# Altium PCB Counter_Display_v2.PcbDoc
Units mm, origin at the board's own origin, x right, y up, seen from the top; angles counter-clockwise.
Board outline 70 x 40 mm, 4 copper layers (Top Layer, Top, Vcc, GND, Bottom Layer, Bottom), stack 1.783 mm thick; 79 components, 66 nets, 245 pads, 272 vias.
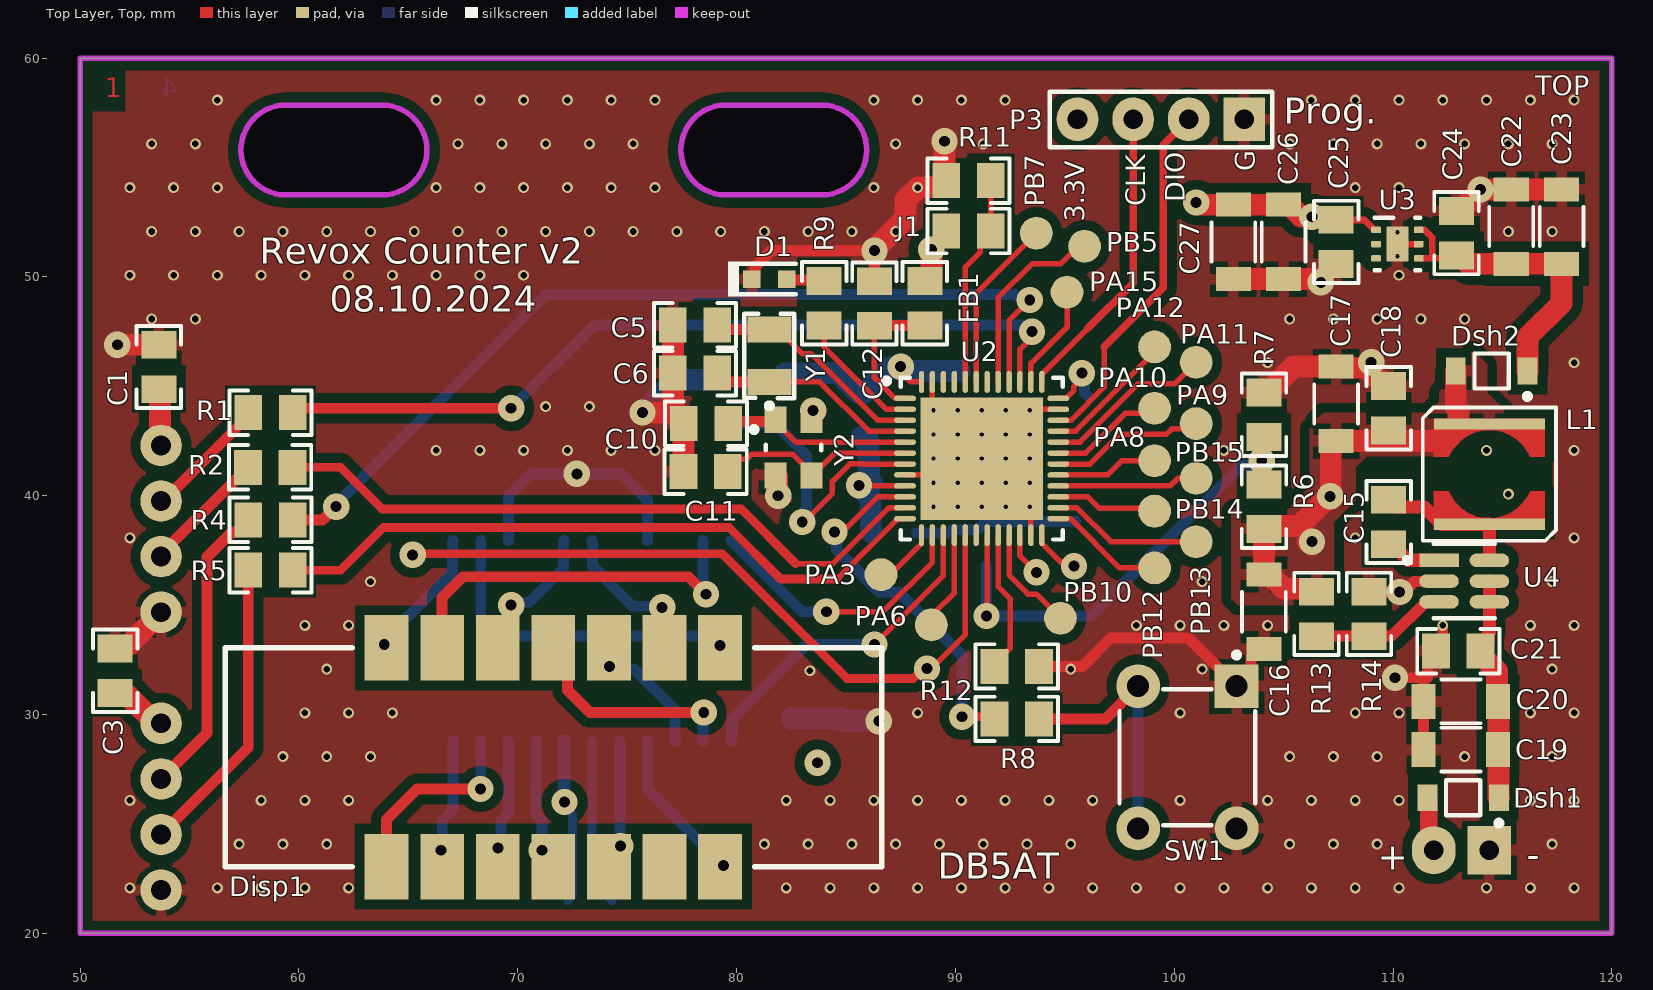
[diagram p0: Top Layer, Top view]
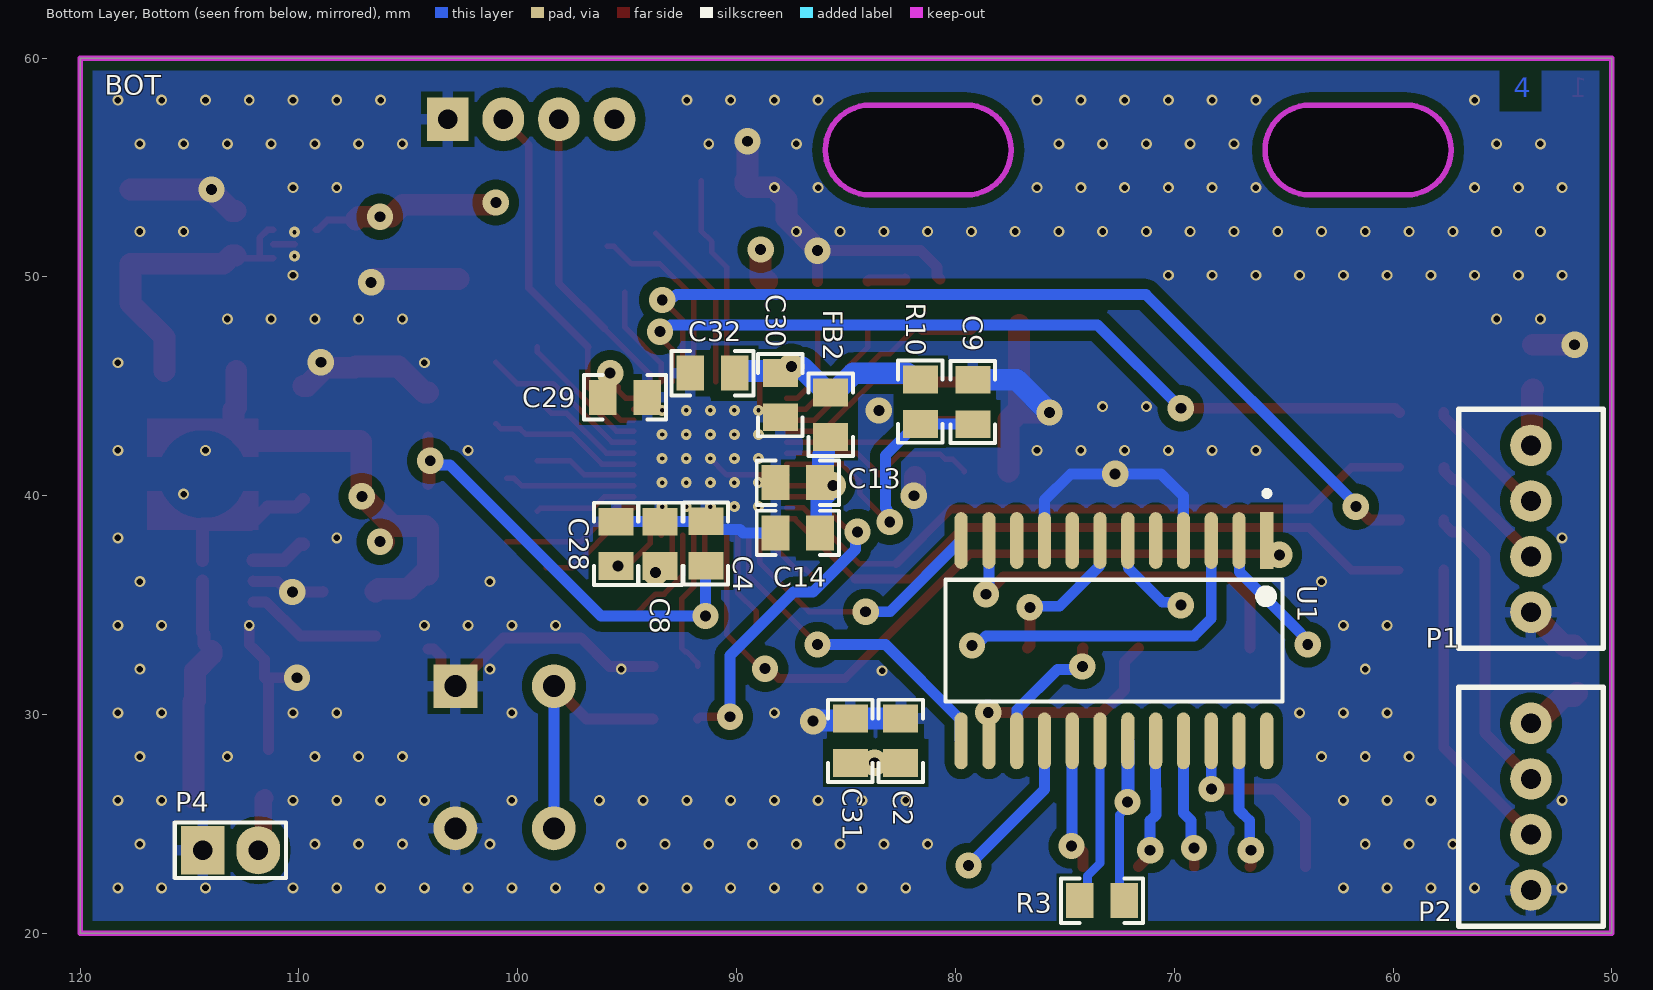
[diagram p1: Bottom Layer, Bottom view, seen from below]
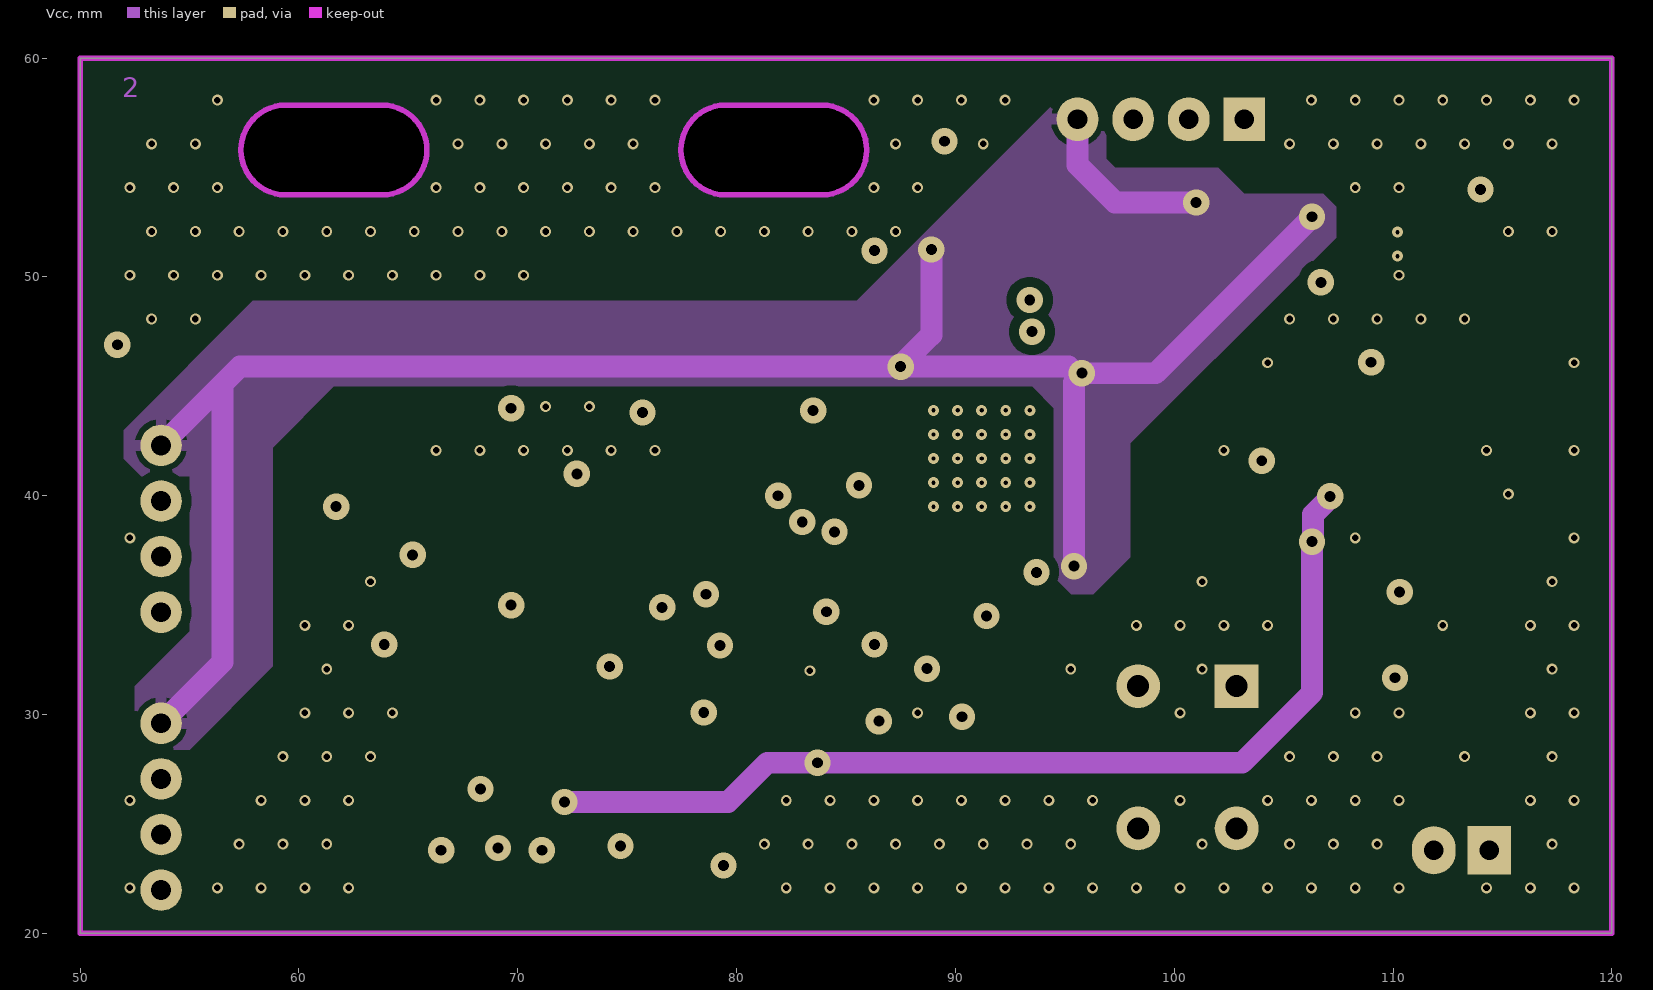
[diagram p2: Vcc]
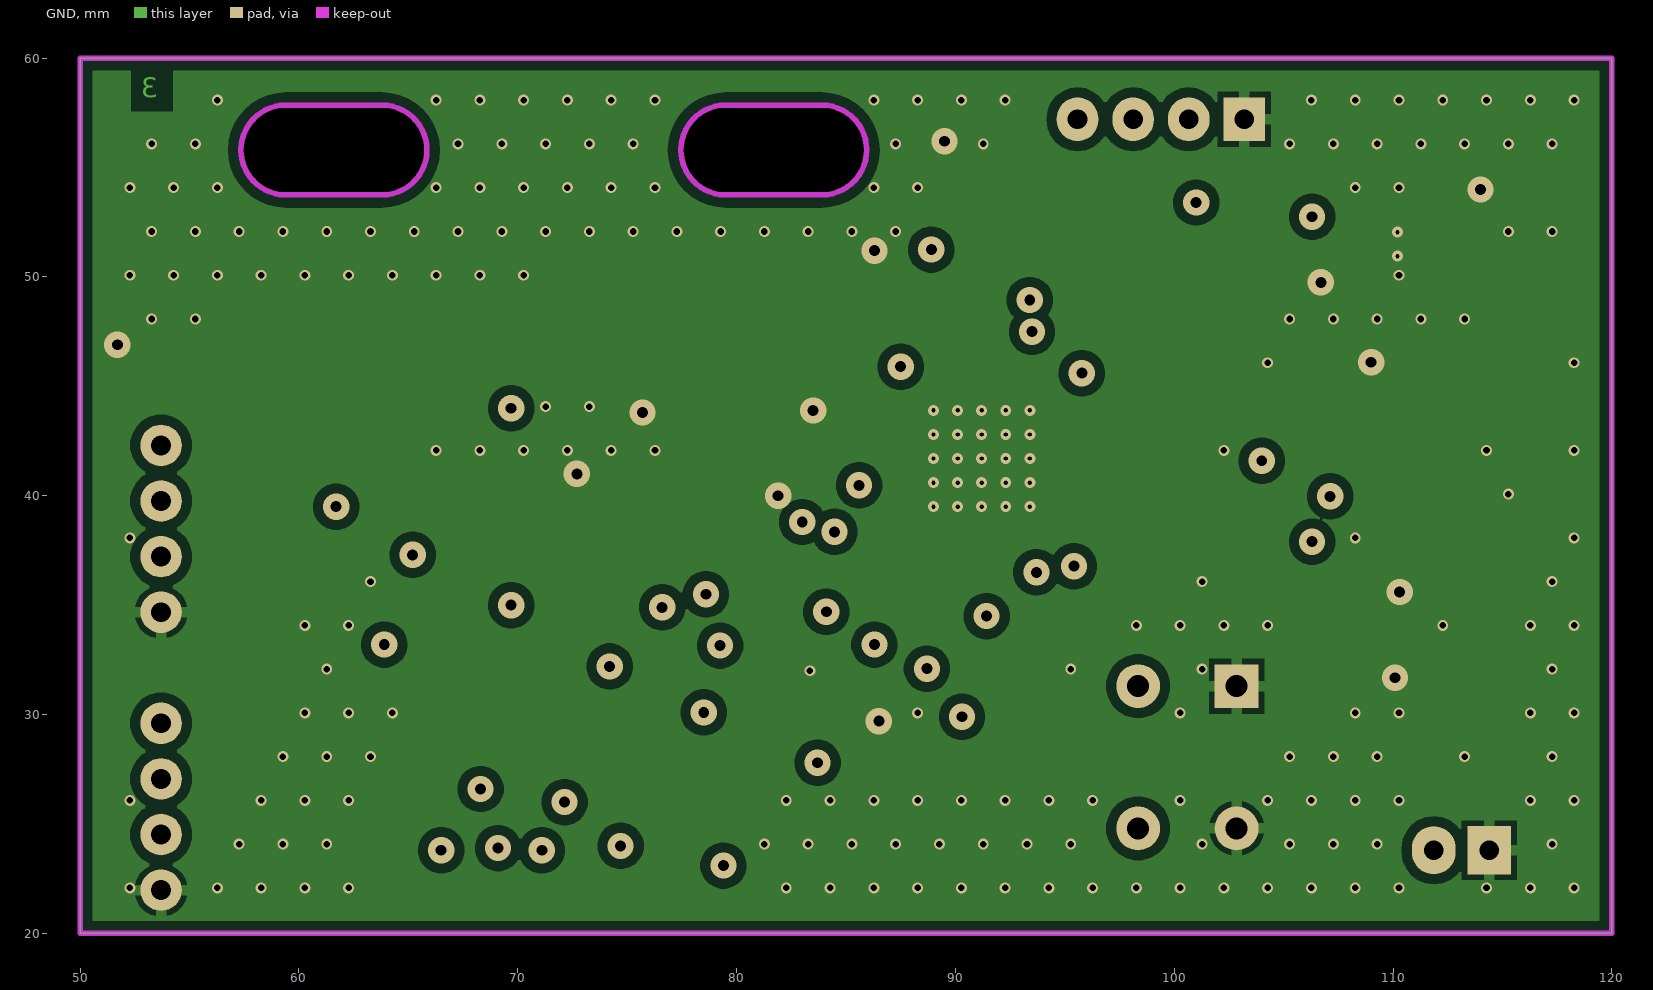
[diagram p3: GND]

## Layer stack, top to bottom
Top Solder, Top Mask: solder mask 0.0102, Solder Resist, Dk 3.5
Top Layer, Top: signal copper 0.0356
Dielectric 2: prepreg 0.0711, PP-006, Dk 4.1
Vcc: signal copper 0.035
Dielectric 1: dielectric 1.5, FR-4, Dk 4.8
GND: signal copper 0.035
Dielectric 3: prepreg 0.0711, PP-006, Dk 4.1
Bottom Layer, Bottom: signal copper 0.0356
Bottom Solder, Bot Mask: solder mask 0.0102, Solder Resist, Dk 3.5

## Board outline
50,20 50,60 120,60 120,20
cut-out: 79.5,53.75 83.9,53.75 ccw(c83.9,55.8) 83.9,57.85 79.5,57.85 ccw(c79.5,55.8)
cut-out: 59.4,53.75 cw(c59.4,55.8) 59.4,57.85 63.8,57.85 cw(c63.8,55.8) 63.8,53.75

## Design rules (kind name [scope] priority, off if disabled: settings)
BoardOutlineClearance [All] p1 off: gap=0.2 ignorepadtopadclearanceinfootprint=FALSE except(0.4: Arc-SplitBarrior Arc-SplitContinuation Track-SplitBarrior Track-SplitContinuation SMDPad-SplitBarrior SMDPad-SplitContinuation THPad-SplitBarrior THPad-SplitContinuation Via-SplitBarrior Via-SplitContinuation Fill-SplitBarrior Fill-SplitContinuation Poly-SplitBarrior Poly-SplitContinuation Region-SplitBarrior Region-SplitContinuation Text-SplitBarrior Text-SplitContinuation)
Clearance [All] p1: gap=0.2 ignorepadtopadclearanceinfootprint=FALSE
ComponentClearance [All] p1: gap=0.254 collisioncheckmode=3 verticalgap=0 showdistances=FALSE donotcheckwithout3dbody=TRUE
Height [All] p1: minheight=0 maxheight=125.4 prefheight=12.7
HoleSize [All] p1: absolutevalues=TRUE maxlimit=6.3 minlimit=0.2 maxpercent=80.000 minpercent=20.000
MinimumAnnularRing [All] p1: minimumring=0.076
MinimumSolderMaskSliver [All] p1: minsoldermaskwidth=0.01
PolygonConnect PolygonConnect_1 [All] p1: thpad.connectstyle=Relief thpad.reliefconductorwidth=0.508 thpad.reliefentries=4 thpad.polygonreliefangle="90 Angle" thpad.airgapwidth=0.254 smdpad.connectstyle=Relief smdpad.reliefconductorwidth=0.508 smdpad.reliefentries=4 smdpad.polygonreliefangle="90 Angle" smdpad.airgapwidth=0.254 via.connectstyle=Direct via.reliefconductorwidth=0.508 via.reliefentries=4 via.polygonreliefangle="90 Angle" via.airgapwidth=0.254
RoomDefinition Counter_Display_v2 [InComponentClass('Counter_Display_v2')] p1: confinementstyle=ConfineIn formatcopy=TRUE lockcomponents=FALSE outline -57.729,-79.923 -6.929,-79.923 -6.929,-54.523 -57.729,-54.523
RoutingCorners [All] p1: cornerstyle=Round minsetback=2.54 maxsetback=2.54
RoutingVias [All] p1: holewidth=0.5 width=1 viastyle="Through Hole" minholewidth=0.2 minwidth=0.45 maxholewidth=3.5 maxwidth=6.5
SilkToSilkClearance [All] p1 off: silktosilkclearance=0.01
SilkToSolderMaskClearance [IsPad] p1 off: minsilkscreentomaskgap=0.01 clearancetoexposedcopper=TRUE
SolderMaskExpansion [All] p1: expansion=0.102 istentingtop=FALSE
Width [All] p1: maxlimit=2.54 minlimit=0.089 preferedwidth=0.381
23 further rules are at their usual default settings.

## Components (designator, comment, footprint, x,y, rotation, side; value= is the part's Value field where it differs from the comment)
C1 "" 0805_HV 53.6,45.884 r90 top value=100n
C2 "" 0805_HV 82.5,28.8 r270 bottom value=100n
C3 "" 0805_HV 51.6,32 r90 top value=100n
C4 "" 0805_HV 91.4,37.816 r90 bottom value=1u
C5 "" 0805_HV 78.1,47.8 r0 top value=1.5p
C6 "" 0805_HV 78.1,45.6 r0 top value=1.5p
C8 "" 0805_HV 93.5,37.8 r90 bottom value=2,2u
C9 "" 0805_HV 79.2,44.284 r270 bottom value=100n
C10 "" 0805_HV 78.6,43.3 r0 top value=8p
C11 "" 0805_HV 78.584,41.1 r180 top value=8p
C12 "" 0805_HV 86.3,48.784 r270 top value=100n
C13 "" 0805_HV 87.2,40.6 r0 bottom value=1u
C14 "" 0805_HV 87.2,38.3 r0 bottom value=100n
C15 "" 0805_HV 109.8,38.8 r90 top value=100n
C16 "" 1206_180 104.1,34.7 r270 top value=10uF
C17 "" 1206_180 107.4,44.2 r90 top value=10uF
C18 "" 0805_HV 109.8,44 r90 top value=100n
C19 "" 1206_180 113.1,28.4 r180 top value=10uF
C20 "" 1206_180 113.1,30.6 r180 top value=10uF
C21 "" 0805_HV 112.984,32.9 r180 top value=100n
C22 "" 1206_180 115.4,52.3 r90 top value=10uF
C23 "" 1206_180 117.7,52.3 r90 top value=10uF
C24 "" 0805_HV 112.9,52 r90 top value=100n
C25 "" 0805_HV 107.4,51.6 r270 top value=100n
C26 "" 1206_180 105,51.6 r270 top value=10uF
C27 "" 1206_180 102.7,51.6 r270 top value=10uF
C28 "" 0805_HV 95.5,37.8 r90 bottom value=100n
C29 "" 0805_HV 95.1,44.5 r180 bottom value=100n
C30 "" 0805_HV 88,44.6 r270 bottom value=100n
C31 "" 0805_HV 84.8,28.8 r270 bottom value=1u
C32 "" 0805_HV 91.1,45.6 r0 bottom value=100n
D1 "150060GS75000" WL-SMCW_GREEN 81.5,49.9 r0 top value=Green
Disp1 "5 Digit 7 Segment" "5 Digit 7 Seg LED" 71.625,28.05 r0 top locked
Dsh1 "DIODE_Shottky" ONSC-SOD-123-2-425-04_V 113.2,26.2 r180 top value=STPST2H100ZFY
Dsh2 "DIODE_Shottky" ONSC-SOD-123-2-425-04_V 114.5,45.7 r180 top value=STPST2H100ZFY
FB1 "" 0805_HV 88.6,48.8 r90 top
FB2 "" 0805_HV 85.7,43.7 r90 bottom
J1 "" 0805_HV 90.6,52.1 r180 top
L1 "MSS5121-333MLB" MSS5121 114.4,40.986 r90 top value=33uH
P1 "Header 4" "4-Pol. Connector" 53.7,34.68 r90 bottom locked
P2 "Header 4" "4-Pol. Connector" 53.7,21.98 r90 bottom locked
P3 "Header 4" HDR1X4 103.2,57.2 r180 top
P4 "Header 2" HDR1X2 114.4,23.8 r180 bottom
PA3 "" TP#1 86.6,36.4 r0 top
PA6 "" TP#1 88.9,34.1 r90 top
PA8 "" TP#2 97.9,41.6 r90 top
PA9 "" TP#3 100.3,43.3 r90 top
PA10 "" TP#4 98,44 r90 top
PA11 "" TP#5 101.6,46.1 r90 top
PA12 "" TP#4 98,46.8 r90 top
PA15 "" TP#1 95.1,49.3 r90 top
PB5 "" TP#1 95.9,51.4 r90 top
PB7 "" TP#1 93.7,52 r90 top
PB10 "" TP#1 94.8,34.4 r90 top
PB12 "" TP#6 97.2,36.7 r90 top
PB13 "" TP#7 99.2,37.9 r90 top
PB14 "" TP#8 97.4,39.3 r90 top
PB15 "" TP#8 99.3,40.8 r90 top
R1 "" 0805_HV 58.7,43.8 r0 top value=120
R2 "" 0805_HV 58.684,41.3 r0 top value=120
R3 "" 0805_HV 73.3,21.5 r0 bottom value=51k
R4 "" 0805_HV 58.7,38.9 r0 top value=120
R5 "" 0805_HV 58.7,36.6 r0 top value=120
R6 "" 0805_HV 104.1,39.5 r90 top value=100k
R7 "" 0805_HV 104.1,43.7 r90 top value=33k
R8 "" 0805_HV 92.8,29.8 r180 top value=120
R9 "" 0805_HV 84,48.8 r270 top value=220
R10 "" 0805_HV 81.6,44.3 r90 bottom value=4,7k
R11 "" 0805_HV 90.6,54.4 r0 top value=10k
R12 "" 0805_HV 92.8,32.2 r180 top value=10k
R13 "" 0805_HV 106.5,34.6 r270 top value=68k
R14 "" 0805_HV 108.9,34.6 r90 top value=22k
SW1 "B3F-1052" Omron_B3F-1052_0 100.6,28.05 r90 top locked
U1 "MAX7219CWG+" Maxim_Integrated_W24-1_IPC_A 72.755,33.378 r270 bottom
U2 "STM32F401CCU6" STM-UFQFPN48_M 91.2,41.7 r0 top
U3 "LP5912Q3.3DRVRQ1" DRV0006A 110.2,51.5 r0 top
U4 "LMR50410Y5FQDBVRQ1" Texas_Instruments_DBV0006A_IPC_A 113.25,36.1 r0 top
Y1 "Qartz_32,768kHz" Quartz_32.768kHz 81.5,46.4 r90 top
Y2 "Qartz_20MHz" "Crystal Oscilator 25MHz" 82.6,42.2 r0 top

## Footprints (in the part's own frame and the unit in brackets; to place one, negate y for a bottom-side part, rotate by r counter-clockwise, add the part's x,y. Pads: shape width x height; smd on the part's side, far side on the other; paste and mask are expansions set on the pad)
"4-Pol. Connector" [mm]
  round 1.9 hole 0.9: 1(0,0) 2(2.54,0) 3(5.08,0) 4(7.62,0)
  silkscreen extent -1.65,-3.3 9.27,3.3
"5 Digit 7 Seg LED" [mm]
  rect 2x3 smd: 1(-7.62,-5) 2(-5.08,-5) 3(-2.54,-5) 4(0,-5) 5(2.54,-5) 6(5.08,-5) 7(7.62,-5) 8(7.62,5) 9(5.08,5) 10(2.54,5) 11(0,5) 12(-2.54,5) 13(-5.08,5) 14(-7.62,5)
  silkscreen extent -15,-5 15,5
0805_HV [mil]
  rect 50x63 smd: 1(-40,0) 2(40,0)
  silkscreen extent -74,-40 74,40, body extent -43,-29 43,29, height 57
1206_180 [mm]
  rect 1.1x1.6 smd: 1(-1.7,0) 2(1.7,0)
  silkscreen extent -0.9,-1 0.9,1, body extent -1.75,-0.95 1.75,0.95, height 1.9
"Crystal Oscilator 25MHz" [mm]
  rect 1x1.2 smd paste+0 mask+0: 1(-0.825,1.27) 2(-0.825,-1.27) 3(0.825,-1.27) 4(0.825,1.27)
  silkscreen extent -1.92,-0.13 1.27,0.95, body extent -1.3,-1.38 1.3,1.38, height 0.25
DRV0006A [mm]
  rrect33% 0.45x0.3 smd: 1(-0.975,0.65) 2(-0.975,0) 3(-0.975,-0.65) 4(0.975,-0.65) 5(0.975,0) 6(0.975,0.65)
  rrect50% 1x0.7 on Top Paste: 7(0,-0.45) 7(0,0.45)
  rrect10% 1x1.6 smd paste-0.5: 7(0,0)
  silkscreen extent -1.05,-1.2 1.05,1.2, body extent -1.05,-1.05 1.05,1.05, height 0.81
HDR1X2 [mm] "Connector; Header; 2 Position"
  rect 2x2.2 hole 0.9: 1(0,0)
  oval 2x2.2 hole 0.9: 2(2.54,0)
  silkscreen extent -1.27,-1.27 3.81,1.27
HDR1X4 [mm] "Connector; Header; 4 Position"
  rect 1.9x2 hole 0.9: 1(0,0)
  oval 1.9x2 hole 0.9: 2(2.54,0) 3(5.08,0) 4(7.62,0)
  silkscreen extent -1.27,-1.27 8.89,1.27
Maxim_Integrated_W24-1_IPC_A [mm]
  rect 2.598x0.607 smd paste+0 mask+0: 1(-4.578,6.985)
  rrect100% 2.598x0.607 smd paste+0 mask+0: 2(-4.578,5.715) 3(-4.578,4.445) 4(-4.578,3.175) 5(-4.578,1.905) 6(-4.578,0.635) 7(-4.578,-0.635) 8(-4.578,-1.905) 9(-4.578,-3.175) 10(-4.578,-4.445) 11(-4.578,-5.715) 12(-4.578,-6.985) 13(4.578,-6.985) 14(4.578,-5.715) 15(4.578,-4.445) 16(4.578,-3.175) 17(4.578,-1.905) 18(4.578,-0.635) 19(4.578,0.635) 20(4.578,1.905) 21(4.578,3.175) 22(4.578,4.445) 23(4.578,5.715) 24(4.578,6.985)
  silkscreen extent -6.85,-7.7 2.78,7.7, body extent -5.16,-7.7 5.16,7.7, height 2.61
MSS5121 [mil]
  rect 20x200 smd: 1(-90,0) 2(90,0)
  Top Layer, Top region: 31,-100 31,-73.21 31,-73.21 37.97,-69.85 50.77,-61.17 61.66,-50.19 70.21,-37.3 76.1,-23 79.11,-7.83 79.13,7.63 76.16,22.81 70.3,37.12 61.79,50.03 50.93,61.04 38.15,69.75 31.19,73.13 31.19,73.13 31,73.4 31,100 100,100 100,-100
  Top Layer, Top region: -31,-100 -31,-73.21 -31,-73.21 -37.97,-69.85 -50.77,-61.17 -61.66,-50.19 -70.21,-37.3 -76.1,-23 -79.11,-7.83 -79.13,7.63 -76.16,22.81 -70.3,37.12 -61.79,50.03 -50.93,61.04 -38.15,69.75 -31.19,73.13 -31.19,73.13 -31,73.4 -31,100 -100,100 -100,-100
  silkscreen extent -120,-120 120,120, body extent -106,-106 106,106, height 87
Omron_B3F-1052_0 [mm]
  rect 2x2 hole 1 paste-1000 mask+0: 1(3.25,-2.25)
  round 2 hole 1 paste-1000 mask+0: 2(-3.25,-2.25) 3(3.25,2.25) 4(-3.25,2.25)
  silkscreen extent -3.1,-3.1 4.8,3.1, body extent -4.13,-3.2 4.13,3.2, height 0.25
ONSC-SOD-123-2-425-04_V [mm] "SOD, 2-Leads, Body 2.69x1.6mm"
  rect 0.91x1.22 smd: A(1.635,0) K(-1.635,0)
  silkscreen extent -1.76,-0.8 0.78,1.28, body extent -1.35,-0.8 1.35,0.8, height 1.35
Quartz_32.768kHz [mm]
  rect 1.2x2 smd paste+0 mask+0: 1(-1.2,0) 2(1.2,0)
  silkscreen extent -2.41,-1.14 1.91,1.14
STM-UFQFPN48_M [mm] "QFN, 48-Leads, Body 7.1x7.1mm, Pitch 0.5mm, Thermal Pad 5.6x5.6mm, IPC Low Density"
  oval 1x0.25 smd: 1(-3.5,2.75) 2(-3.5,2.25) 3(-3.5,1.75) 4(-3.5,1.25) 5(-3.5,0.75) 6(-3.5,0.25) 7(-3.5,-0.25) 8(-3.5,-0.75) 9(-3.5,-1.25) 10(-3.5,-1.75) 11(-3.5,-2.25) 12(-3.5,-2.75) 25(3.5,-2.75) 26(3.5,-2.25) 27(3.5,-1.75) 28(3.5,-1.25) 29(3.5,-0.75) 30(3.5,-0.25) 31(3.5,0.25) 32(3.5,0.75) 33(3.5,1.25) 34(3.5,1.75) 35(3.5,2.25) 36(3.5,2.75)
  oval 0.25x1 smd: 13(-2.75,-3.5) 14(-2.25,-3.5) 15(-1.75,-3.5) 16(-1.25,-3.5) 17(-0.75,-3.5) 18(-0.25,-3.5) 19(0.25,-3.5) 20(0.75,-3.5) 21(1.25,-3.5) 22(1.75,-3.5) 23(2.25,-3.5) 24(2.75,-3.5) 37(2.75,3.5) 38(2.25,3.5) 39(1.75,3.5) 40(1.25,3.5) 41(0.75,3.5) 42(0.25,3.5) 43(-0.25,3.5) 44(-0.75,3.5) 45(-1.25,3.5) 46(-1.75,3.5) 47(-2.25,3.5) 48(-2.75,3.5)
  rect 5.6x5.6 smd: 49(0,0)
  silkscreen extent -4.47,-3.7 3.7,3.7, body extent -3.55,-3.55 3.55,3.55, height 0.6
Texas_Instruments_DBV0006A_IPC_A [mm]
  rect 1.805x0.61 smd paste+0 mask+0: 1(-1.15,0.95)
  rrect100% 1.805x0.61 smd paste+0 mask+0: 2(-1.15,0) 3(-1.15,-0.95) 4(1.15,-0.95) 5(1.15,0) 6(1.15,0.95)
  silkscreen extent -2.73,-1.7 1.4,1.7, body extent -2.55,-1.95 2.55,1.95, height 0.25
TP#1 [mm]
  round 1.5 smd: 1(0,0)
TP#2 [mm]
  round 1.5 smd: 1(0,-1.2)
TP#3 [mm]
  round 1.5 smd: 1(0,-0.7)
TP#4 [mm]
  round 1.5 smd: 1(0,-1.1)
TP#5 [mm]
  round 1.5 smd: 1(0,0.6)
TP#6 [mm]
  round 1.5 smd: 1(0,-1.9)
TP#7 [mm]
  round 1.5 smd: 1(0,-1.8)
TP#8 [mm]
  round 1.5 smd: 1(0,-1.7)
WL-SMCW_GREEN [mm]
  rect 0.8x0.8 smd: 1(-0.8,0) 2(0.8,0)
  silkscreen extent -1.9,-0.8 1.2,0.8, body extent -0.85,-0.45 0.85,0.45, height 0.8

## Part data
C1 C2 C3 C4 C5 C6 C8 C9 C10 C11 C12 C13 C14 C15 C18 C21 C24 C25 C28 C29 C30 C31 C32: library part C0805, "CAP, CERM, +/- 10%, X7S,  0805", TempCo=X7S, Tolerance_%=10, Value1=25V, CompType=Capacitor, MountType=SMT, PackageReference=0805, SizeArea_mm2=2.5, SizeAreaWB_mm2=6.75, SizeX_mm=2, SizeY_mm=1.25, SizeZ_mm=1.45, Technology=Ceramic
C16 C17 C19 C20 C22 C23 C26 C27: library part C1206, "CAP, CERM, NP0, 1206", TempCo=X7R, Tolerance_%=10, Value1=50V, MountType=SMT, PackageReference=1206, SizeArea_mm2=5.12, SizeAreaWB_mm2=10.92, SizeX_mm=3.2, SizeY_mm=1.6, SizeZ_mm=1.8, TaMax_C=125, TaMin_C=-55, Technology=Ceramic
D1: "LED, Green, SMD", Color=Green, Manufacturer="Wurth Elektronik", Supplier Part Number 1=732-4971-1-ND, Value1=W, Value2=3.2V, Angle=140, ComponentLink1Description="Datasheet link", ComponentLink1URL=http://katalog.we-online.de/led/datasheet/150060GS75000.pdf, CompType=LED, Io_A=0.02, LatestRevisionDate=2015-10-23, MountType=SMT, PackageReference=LED_0603, PartNumber=150060GS75000, Published=2008-07-11, Publisher="Texas Instruments", RoHS=Y, Supplier 1=Digi-Key, Supplier 2=Mouser, Supplier 3=Farnell, Supplier Part Number 2=710-150060GS75000, Supplier Part Number 3=2322070, SymbolVersion=2008-11-06, Tjmax_C=85, Type=InGaN, U/M=EA, Vf_V=3.2
Disp1: "0,2\" 7 Segment LED 5 Digit Display"
Dsh1 Dsh2: "Diode Shottky"
FB1 FB2 J1 R1 R2 R3 R4 R5 R6 R7 R8 R9 R10 R11 R12 R13 R14: library part R0805, "RES, 1%, 0.1 W, 0805", Value1=1%, MountType=SMT, PackageReference=0805, SizeX_mm=2, SizeY_mm=1.25, SizeZ_mm=0.75
L1: "Inductor, Shielded Drum Core, Ferrite, 33 µH, 0.67 A, 0.48 ohm, SMD", Manufacturer=Coilcraft, Value1="0.48 ohm", Value2=0.67A, ValueDisplayed=4,7µH, AEC Category=Q200, AEC Qualified=?, ComponentLink1Description="Datasheet link", ComponentLink1URL=http://www.coilcraft.com/pdfs/mss5121.pdf, CompType=Inductor, DCR_ohm=0.48, Imax_A=0.67, Ind_H=33.0E-6, Irms="0.76A @ 40C rise", Isat="0.67A @ 30% inductance drop", LatestRevisionDate=2016-06-24, Material=Ferrite, MountType=SMT, PackageReference=MSS5121, PartNumber=MSS5121-333MLB, Published=2008-06-26, Publisher="Texas Instruments", RoHS=Y, SymbolVersion=2008-07-23, Technology="Shielded Drum Core"
P1 P2 P3: "Header, 4-Pin", LatestRevisionDate=17-Jul-2002, LatestRevisionNote="Re-released for DXP Platform.", Publisher="Altium Limited"
P4: "Header, 2-Pin", LatestRevisionDate=17-Jul-2002, LatestRevisionNote="Re-released for DXP Platform.", Publisher="Altium Limited"
PA3 PA6 PA8 PA9 PA10 PA11 PA12 PA15 PB5 PB7 PB10 PB12 PB13 PB14 PB15: library part TP, "Test Point, Miniature, Red, TH", Color=Red, Manufacturer=Keystone, PartNumber=5000, Supplier Part Number 1=36-5000-ND, CNHeader=FALSE, ComponentLink1Description="Datasheet URL", ComponentLink1URL=http://www.keyelco.com/userAssets/file/M60-2p60.pdf, CompType="Test Point", ContactFinish=Silver, CT=TRUE, Green_EU RoHS=Passed, Green_EU RoHS-2=Incomplete, Green_Lifecycle=Active, Green_REACh=Passed, LatestRevisionDate=26/05/2017, MountType=TH, PackageReference="Red Miniature Testpoint", Publisher="Texas Instruments", RoHS=Y, Supplier 1=Digi-Key, Supplier 2=Mouser, Supplier Part Number 2=534-5000
U2: "ARM Cortex-M4 32-bit MCU+FPU, 105 DMIPS, 256 kB Flash, 64 kB Internal RAM, 36 I/Os, 48-pin UFQFPN, -40 to 85 degC, Tray", I/Os (High Current)=36, Manufacturer=STMicroelectronics, Operating Frequency(F) (Processor speed) (MHz)=84, Supply Voltage(Vcc) max (V)=3.6, Supply Voltage(Vcc) min (V)=1.8, ComponentLink1Description="Manufacturer URL", ComponentLink1URL=http://www.st.com/web/en/home.html, ComponentLink2Description=Datasheet, ComponentLink2URL=http://www.st.com/st-web-ui/static/active/en/resource/technical/document/data_brief/DM00071938.pdf, ComponentLink3Description="Package Specification", ComponentLink3URL=http://www.st.com/st-web-ui/static/active/en/resource/technical/document/data_brief/DM00071938.pdf, Core="ARM Cortex-M4", DatasheetVersion="Rev. 1", FLASH Size (Prog) (kB)=256, Internal RAM Size (kB)=64, Mounting Technology="Surface Mount", PackageDescription="48-Pin Ultra Thin Fine Pitch Quad Flat No-Lead, 7 x 7 x 0.6 mm Body, 0.5 mm Pitch, Exposed Pad", PackageReference=UFQFPN48, PackageVersion="Rev. 1, 04/2013", Packing=Tray, PartNumber=STM32F401CCU6
U3: "Ultra Low-Noise, 500-mA Linear Regulator for RF and Analog Circuits - Requires No Bypass Capacitor, DRV0006A", Alternate Manufacturer="Texas Instruments", Alternate PartNumber=LP5912Q3.3DRVTQ1, ComponentLink1Description="Datasheet Link", ComponentLink1URL=http://www.ti.com/lit/ds/symlink/lp5912-q1.pdf, CompType=IC, LatestRevisionDate=2016-07-23, Manufacturer="Texas Instruments", MountType=SMT, PackageDescription=WSON-6, PackageReference=DRV0006A, PartNumber=LP5912Q3.3DRVRQ1, Publisher="Texas Instruments", RoHS=Y, SizeArea_mm2=4, SizeAreaWB_mm2=9, SizeX_mm=2, SizeY_mm=2, SizeZ_mm=0.8, SymbolCreator=a0411947, SymbolVersion=2016-05-21, U/M=EA
Y1: "CRYS", frequency="16 MHz", load_capacitance="18 pF", Manufacturer=Euroquartz, Octopart Part Number=45978c55d5b29a50, Package=SMT_XTAL_11MM35_3MM68, Part Number=32.768kHz, Temperature="-40°C to +85°C", Temperature Range High=+85°C, Temperature Range Low=-40°C, Category 008Acd80318Bdb4D=Crystals/Resonators/Oscillators, Category 9Afb57F1Abf5413C=Crystals, Category 7542B8484461Ae85="Passive Components", ComponentLink1Description=Upverter, ComponentLink1URL=https://upverter.com/upn/revision/05c5f50b0b55a54c/, ComponentLink2Description=Datasheet, ComponentLink2URL=https://upverter.com/datasheet/0b0a610900101a63fb5a28c721a8a2dd099ef9d5.pdf, Digikey Description=CRYS, helpURL=https://upverter.com/upn/revision/05c5f50b0b55a54c/, Lead Free=yes, Num Pins=2, RoHS=TRUE, Supplier 1=Digi-Key, Supplier 2=Mouser
Y2: "CRYS", frequency="16 MHz", load_capacitance="18 pF", Manufacturer=Euroquartz, Octopart Part Number=45978c55d5b29a50, Package=SMT_XTAL_11MM35_3MM68, Part Number=20MHz, Temperature="-40°C to +85°C", Temperature Range High=+85°C, Temperature Range Low=-40°C, Category 008Acd80318Bdb4D=Crystals/Resonators/Oscillators, Category 9Afb57F1Abf5413C=Crystals, Category 7542B8484461Ae85="Passive Components", ComponentLink1Description=Upverter, ComponentLink1URL=https://upverter.com/upn/revision/05c5f50b0b55a54c/, ComponentLink2Description=Datasheet, ComponentLink2URL=https://upverter.com/datasheet/0b0a610900101a63fb5a28c721a8a2dd099ef9d5.pdf, Digikey Description=CRYS, helpURL=https://upverter.com/upn/revision/05c5f50b0b55a54c/, Lead Free=yes, Num Pins=2, RoHS=TRUE, Supplier 1=Digi-Key, Supplier 2=Mouser

## Via types
v1: diameter 0.5, hole 0.3, Top Layer, Top to Bottom Layer, Bottom, tented both sides, 194 vias
v2: diameter 1.2, hole 0.5, Top Layer, Top to Bottom Layer, Bottom, 51 vias
v3: diameter 0.5, hole 0.2, Top Layer, Top to Bottom Layer, Bottom, 27 vias

## Nets (pads, with @x,y where several pads share a name; then routed paths per layer and width w, separated by ;. In a path a pad name is that pad's centre, name@x,y a point inside that pad or via, vN(x,y) a via of type N, cw(c..) or ccw(c..) an arc to the next point about the centre after c; other vN are vias at no path point)
3V3: C1.1 C3.1 C25.1 C26.1 C27.1 C28.1 C29.1 C30.1 C32.1 FB1.2 FB2.2 J1.2 P1.4 P2.4 P3.4 R10.2 U2.24 U2.36 U2.48 U3.1 | length 128.3
  Top Layer, Top w0.25: v2(87.5,45.9) 87.5,45.65 87.95,45.2 U2.48 ; U2.24 93.95,37.825 94.809,36.966 95.234,36.966 v2(95.416,36.784) ; U2.36 95.075,44.45 95.075,44.475 95.416,44.816 95.416,44.984 95.775,45.343 v2(95.775,45.6)
  Top Layer, Top w0.3: C25.1 107.416,52.6 108.7,52.6 109.15,52.15 U3.1
  Top Layer, Top w1: C3.1 51.735,30.849 52.207,30.849 53.456,29.6 P2.4 ; C1.1 53.65,44.818 53.65,42.35 P1.4 ; FB1.2 88.765,49.816 88.9,49.951 v2(88.9,51.251) ; v2(101,53.4) 101.054,53.4 101.154,53.3 C27.1 C26.1 105.25,53.3 105.799,52.751 v2(106.3,52.751) 107.265,52.751 C25.1
  Vcc w1: P2.4 56.5,32.4 56.5,45.1 ; P1.4 56.5,45.1 ; v2@87.554,45.9 95.163,45.9 95.425,45.638 95.829,45.638 v2@95.867,45.6 ; v2(88.9,51.251) 88.9,47.354 87.5,45.954 v2(87.5,45.9) 57.3,45.9 56.5,45.1 ; v2(95.416,36.784) 95.416,45.187 95.829,45.6 v2@95.867,45.6 ; P3.4 95.58,55.12 97.3,53.4 v2(101,53.4) ; v2(106.3,52.751) 99.149,45.6 v2@95.867,45.6
  Bottom Layer, Bottom w0.5: v2(95.775,45.6) 95.909,45.466 95.909,44.707 C29.1
  Bottom Layer, Bottom w1: R10.2@82.2,45.6 84.651,45.6 85.535,44.716 FB2.2 85.865,44.716 87.011,45.862 87.462,45.862 v2(87.5,45.9) 87.554,45.9 87.754,45.7 C32.1@90.184,45.7
5V: C2.2 C16.1 C17.1 C18.1 C31.2 Dsh2.A L1.2 R3.1 R6.1 R13.1 U1.19 | length 73
  Top Layer, Top w0.6: C16.1 C16.1@104.35,36.4
  Top Layer, Top w1: C16.1 R6.1 104.235,38.619 105.719,38.619 107.15,40.05 107.15,42.45 107.2,42.5 C17.1 112.4,42.5 112.986,43.086 112.986,43.914 112.865,44.035 Dsh2.A ; C16.1@104.35,36.4 104.999,35.751 106.365,35.751 R13.1 ; v2@106.1,37.9 v2(106.3,37.9)
  Vcc w1: v2(72.14,26) 79.6,26 81.4,27.8 103.1,27.8 106.3,31 v2(106.3,37.9) 106.338,37.938 106.338,39.136 107.124,39.921 v2(107.124,39.975)
  Bottom Layer, Bottom w0.4: v2(72.14,26) 72.14,25.784 72.5,25.424 72.5,21.716 R3.1
  Bottom Layer, Bottom w0.6: U1.19 U1.19 72.121,26.019 v2(72.14,26)
  other v2: 83.7,27.8
BOOT0: J1.1 R11.2 U2.44 | length 9.7
  Top Layer, Top w0.25: U2.44 90.45,50.45 91.125,51.125 91.125,51.609 J1.1 R11.2
CLK: U1.13 U2.15 | length 15.3
  Top Layer, Top w0.25: v2(86.3,33.2) 89.45,36.35 U2.15
  Bottom Layer, Bottom w0.5: U1.13 79.789,28.849 79.789,29.816 79.822,29.849 79.849,29.849 83.2,33.2 v2(86.3,33.2)
CS_LED: U1.12 U2.14 | length 12.7
  Top Layer, Top w0.25: v2(84.1,34.7) 86.7,34.7 88.95,36.95 U2.14
  Bottom Layer, Bottom w0.5: U1.12 82.996,34.7 v2(84.1,34.7)
GND: C1.2 C2.1 C3.2 C4.2 C5.1 C6.1 C8.2 C9.1 C10.1 C11.2 C12.1 C13.2 C14.2 C16.2 C17.2 C18.2 C19.2 C20.2 C21.2 C22.2 C23.2 C24.2 C25.2 C26.2 C27.2 C28.2 C29.2 C30.2 C31.1 C32.2 D1.1 P1.1 P2.1 P3.1 P4.1 R7.2 R11.1 R12.1 R14.2 SW1.1 SW1.2 U1.4 U1.9 U2.8 U2.23 U2.35 U2.47 U2.49 U3.5 U3.7@110.2,51.5 U4.2 Y2.2 Y2.4 | length 104.4
  Top Layer, Top w0.25: U2.8 90.45,40.95 v3(91.2,41.7) ; U2.47 88.95,43.95 v3(89,43.9) ; v3(93.4,39.5) 93.45,39.45 U2.23 ; v3(93.4,43.9) 93.45,43.95 U2.35
  Top Layer, Top w0.3: U3.7@110.2,51.5 U3.5
  Top Layer, Top w0.5: D1.1 80.85,50.05 80.85,50.45 81.6,51.2 v2(86.3,51.2) C12.1 ; R12.1 95.8,32.2 97.1,33.5 100.65,33.5 SW1.1 103.5,31.95 103.5,32.65 103.85,33 C16.2 ; R14.2 108.908,35.608 110.292,35.608 v2(110.3,35.6) 110.489,35.6 110.968,36.079 112.078,36.079 U4.2 ; v2(110.083,31.683) 111.583,31.683 ; C19.2 C20.2 111.4,31.5 111.583,31.683 ; v1(112.271,34.077) 112.271,33.203 C21.2 111.583,32.515 111.583,31.683
  Top Layer, Top w1: C3.2 51.735,33.151 52.171,33.151 P1.1 ; v2(51.7,46.9) C1.2 ; v2(75.7,43.8) 77.084,43.8 77.284,43.6 C10.1@77.449,43.6 ; C5.1 77.1,47.784 77.1,43.949 C10.1@77.449,43.6 ; C11.2 77.576,41.108 77.576,43.292 C10.1 77.584,43.465 C10.1@77.449,43.6 ; Y2.2@81.85,40.86 81.85,40.104 81.9,40.054 v2(81.9,40) ; v2(86.3,51.2) 86.3,51.254 87.714,52.668 87.714,53.514 88.3,54.1 89.449,54.1 89.584,54.235 R11.1 89.5,54.484 v2(89.5,56.2) ; C27.2 106.551,49.9 v2(106.7,49.751) ; R7.2 104.265,44.716 105.449,45.9 C17.2 107.45,45.85 108.801,45.85 109.635,45.016 C18.2 ; C24.2 113.065,53.016 114,53.951 v2(114,54) C22.2 C23.2
  Bottom Layer, Bottom w0.5: U1.4 69.58,39.98 70.6,41 74.73,41 75.93,39.8 U1.9 ; C14.2 89.7,38.3 89.85,38.45 91.018,38.45 C4.2 91.408,38.824 95.492,38.824 C28.2
  Bottom Layer, Bottom w1: v2(75.7,43.8) 77.2,45.3 C9.1 ; C2.1 C31.1 84.878,29.738 86.462,29.738 v2(86.5,29.7)
  other v1: 52.271,22.077 56.271,22.077 58.271,22.077 60.271,22.077 62.271,22.077 82.271,22.077 84.271,22.077 86.271,22.077 88.271,22.077 90.271,22.077 92.271,22.077 94.271,22.077 96.271,22.077 98.271,22.077 100.271,22.077 102.271,22.077 104.271,22.077 106.271,22.077 108.271,22.077 110.271,22.077 114.271,22.077 116.271,22.077 118.271,22.077 57.271,24.077 59.271,24.077 61.271,24.077 81.271,24.077 83.271,24.077 85.271,24.077 87.271,24.077 89.271,24.077 91.271,24.077 93.271,24.077 95.271,24.077 101.271,24.077 105.271,24.077 107.271,24.077 109.271,24.077 117.271,24.077 52.271,26.077 58.271,26.077 60.271,26.077 62.271,26.077 82.271,26.077 84.271,26.077 86.271,26.077 88.271,26.077 90.271,26.077 92.271,26.077 94.271,26.077 96.271,26.077 100.271,26.077 104.271,26.077 106.271,26.077 108.271,26.077 110.271,26.077 116.271,26.077 118.271,26.077 59.271,28.077 61.271,28.077 63.271,28.077 105.271,28.077 107.271,28.077 109.271,28.077 113.271,28.077 117.271,28.077 60.271,30.077 62.271,30.077 64.271,30.077 88.271,30.077 100.271,30.077 108.271,30.077 110.271,30.077 116.271,30.077 118.271,30.077 83.346,32.002 61.271,32.077 95.271,32.077 101.271,32.077 117.271,32.077 60.271,34.077 62.271,34.077 98.271,34.077 100.271,34.077 102.271,34.077 104.271,34.077 116.271,34.077 118.271,34.077 63.271,36.077 101.271,36.077 117.271,36.077 52.271,38.077 108.271,38.077 118.271,38.077 115.271,40.077 66.271,42.077 68.271,42.077 70.271,42.077 72.271,42.077 74.271,42.077 76.271,42.077 102.271,42.077 114.271,42.077 118.271,42.077 71.271,44.077 73.271,44.077 104.271,46.077 118.271,46.077 53.271,48.077 55.271,48.077 105.271,48.077 107.271,48.077 109.271,48.077 111.271,48.077 113.271,48.077 52.271,50.077 54.271,50.077 56.271,50.077 58.271,50.077 60.271,50.077 62.271,50.077 64.271,50.077 66.271,50.077 68.271,50.077 70.271,50.077 110.271,50.077 53.271,52.077 55.271,52.077 57.271,52.077 59.271,52.077 61.271,52.077 63.271,52.077 65.271,52.077 67.271,52.077 69.271,52.077 71.271,52.077 73.271,52.077 75.271,52.077 77.271,52.077 79.271,52.077 81.271,52.077 83.271,52.077 85.271,52.077 87.271,52.077 115.271,52.077 117.271,52.077 52.271,54.077 54.271,54.077 56.271,54.077 66.271,54.077 68.271,54.077 70.271,54.077 72.271,54.077 74.271,54.077 76.271,54.077 86.271,54.077 88.271,54.077 108.271,54.077 110.271,54.077 53.271,56.077 55.271,56.077 67.271,56.077 69.271,56.077 71.271,56.077 73.271,56.077 75.271,56.077 87.271,56.077 91.271,56.077 105.271,56.077 107.271,56.077 109.271,56.077 111.271,56.077 113.271,56.077 115.271,56.077 117.271,56.077 56.271,58.077 66.271,58.077 68.271,58.077 70.271,58.077 72.271,58.077 74.271,58.077 76.271,58.077 86.271,58.077 88.271,58.077 90.271,58.077 92.271,58.077 106.271,58.077 108.271,58.077 110.271,58.077 112.271,58.077 114.271,58.077 116.271,58.077 118.271,58.077
  other v2: 72.7,41 83.5,43.9 109,46.1
  other v3: 89,39.5 90.1,39.5 91.2,39.5 92.3,39.5 89,40.6 90.1,40.6 91.2,40.6 92.3,40.6 93.4,40.6 89,41.7 90.1,41.7 92.3,41.7 93.4,41.7 89,42.8 90.1,42.8 91.2,42.8 92.3,42.8 93.4,42.8 90.1,43.9 91.2,43.9 92.3,43.9 110.2,50.95 110.2,52.05
L_Rell_DIR: R4.2 U2.40 | length 42.2
  Top Layer, Top w0.25: U2.40 92.45,48 v2(93.397,48.946)
  Top Layer, Top w0.5: R4.2 61.084,38.9 61.684,39.5 v2(61.7,39.5)
  Bottom Layer, Bottom w0.5: v2(61.7,39.5) 61.7,39.6 71.3,49.2 92.754,49.2 92.874,49.08 93.263,49.08 v2(93.397,48.946)
L_Rell_INT: R5.2 U2.12 | length 30.9
  Top Layer, Top w0.25: 84.6,36.2 87.325,38.925 87.325,38.95 U2.12
  Top Layer, Top w0.4: R5.2 61.9,36.6 63.85,38.55 79.65,38.55 82,36.2 84.6,36.2
LED: R9.2 U2.2 | length 5.9
  Top Layer, Top w0.25: R9.2 84,46.8 86.85,43.95 U2.2
MISO: PA6.1 U2.16 | length 4.5
  Top Layer, Top w0.25: PA6.1@89.1,34.1 89.1,34.7 89.95,35.55 U2.16
MOSI: U1.1 U2.17 | length 33
  Top Layer, Top w0.25: v2(88.7,32.1) 88.9,32.1 90.45,33.65 U2.17
  Top Layer, Top w0.4: v2(65.2,37.3) 65.25,37.35 79.35,37.35 85.05,31.65 88.066,31.65 88.516,32.1 v2(88.7,32.1)
NetC4_1: C4.1 R6.2 R7.1 U2.19 | length 24.8
  Top Layer, Top w0.25: v2(91.425,34.5) 91.45,34.525 U2.19
  Top Layer, Top w0.5: v2(104,41.6) 104,40.616 R6.2 R7.1
  Bottom Layer, Bottom w0.5: C4.1 91.425,36.775 v2(91.425,34.5) 96.2,34.5 103.1,41.4 103.8,41.4 v2(104,41.6)
NetC5_2: C5.2 U2.3 Y1.2 | length 10.4
  Top Layer, Top w0.25: Y1.2 81.9,47.6 83,46.5 83.4,46.5 86.448,43.452 86.641,43.452 86.643,43.45 U2.3
  Top Layer, Top w0.5: C5.2 79.316,47.6 Y1.2
NetC6_2: C6.2 U2.4 Y1.1 | length 9.7
  Top Layer, Top w0.25: Y1.1 83.8,45.2 86.048,42.952 86.434,42.952 86.436,42.95 86.625,42.95 U2.4
  Top Layer, Top w0.5: C6.2 79.116,45.585 79.501,45.2 Y1.1
NetC8_1: C8.1 U2.22 | length 2.4
  Top Layer, Top w0.25: U2.22 92.95,37.25 v2(93.7,36.5)
  Bottom Layer, Bottom w0.25: C8.1 93.7,36.584 v2(93.7,36.5)
NetC10_2: C10.2 U2.5 Y2.1 | length 8.5
  Top Layer, Top w0.25: Y2.1@81.85,43.3 82.698,42.452 86.227,42.452 86.229,42.45 86.418,42.45 U2.5
  Top Layer, Top w0.5: C10.2 79.716,43.4 81.75,43.4 Y2.1@81.85,43.3
NetC11_1: C11.1 U2.6 Y2.3 | length 9.3
  Top Layer, Top w0.25: C11.1 79.6,41.154 80.11,41.664 80.464,41.664 80.7,41.9 81.115,41.9 81.12,41.905 82.43,41.905 82.435,41.9 82.56,41.9 83.5,40.96 84.492,41.952 86.02,41.952 86.022,41.95 86.211,41.95 U2.6
NetC12_2: C12.2 FB1.1 U2.1 | length 6.5
  Top Layer, Top w0.25: C12.2 86.3,45.4 87.25,44.45 U2.1
  Top Layer, Top w0.5: C12.2 86.308,47.776 88.592,47.776 FB1.1
NetC13_1: C13.1 C14.1 FB2.1 U2.9 | length 7.8
  Top Layer, Top w0.25: v2(85.598,40.477) 85.625,40.45 U2.9
  Bottom Layer, Bottom w1: C13.1@85.663,40.412 85.636,40.385 86.131,39.89 86.131,38.353 C14.1 ; FB2.1 85.865,42.684 86,42.549 86,41.874 86.049,41.825 86.049,40.735 C13.1 86.099,40.515 85.636,40.515 v2(85.598,40.477) C13.1@85.829,40.245
NetC15_1: C15.1 U4.1 | length 2.6
  Top Layer, Top w0.6: C15.1 109.965,37.784 110.694,37.055 112.094,37.055 U4.1
NetC15_2: C15.2 L1.1 U4.6 | length 6.7
  Top Layer, Top w0.6: C15.2 110.135,39.481 111.425,39.481 112.206,38.7 L1.1 U4.6
NetC19_1: C19.1 C20.1 C21.1 Dsh1.K U4.4 U4.5 | length 10.4
  Top Layer, Top w0.6: C21.1 114.335,33.235 114.335,33.687 114.4,33.752 U4.4 U4.5
  Top Layer, Top w1: C21.1 114,32.735 114.75,31.985 114.75,30.65 C20.1 114.817,30.582 114.817,26.217 Dsh1.K
NetC22_1: C22.1 C23.1 C24.1 Dsh2.K U3.4 U3.6 | length 14
  Top Layer, Top w0.3: U3.4 111.7,50.85 ; U3.6 111.437,52.15 111.8,51.787 111.8,50.95 111.7,50.85 ; C24.1 112.766,50.85 111.7,50.85
  Top Layer, Top w1: C24.1 113.065,50.984 113.449,50.6 C22.1 C23.1 117.7,48.8 116.135,47.235 Dsh2.K
NetD1_2: D1.2 R9.1 | length 1.7
  Top Layer, Top w0.5: D1.2 82.342,49.858 83.958,49.858 R9.1
NetDisp1_1: Disp1.1 U1.22 | length 9.2
  Top Layer, Top w0.5: Disp1.1 64.005,25.205 65.4,26.6 v2(68.3,26.6)
  Bottom Layer, Bottom w0.5: v2(68.3,26.6) 68.31,26.61 U1.22
NetDisp1_2: Disp1.2 U1.23 | length 6
  Top Layer, Top w0.5: v2(66.5,23.8) 66.5,23.095 Disp1.2
  Bottom Layer, Bottom w0.5: v2(66.5,23.8) 66.55,23.85 66.55,25.15 67.04,25.64 U1.23
NetDisp1_3: Disp1.3 U1.21 | length 6
  Top Layer, Top w0.5: Disp1.3 69.085,23.885 v2(69.1,23.9)
  Bottom Layer, Bottom w0.5: v2(69.1,23.9) 69.234,24.034 69.234,25.154 69.58,25.5 U1.21
NetDisp1_4: Disp1.4 U1.20 | length 6.1
  Top Layer, Top w0.5: v2(71.1,23.8) 71.1,23.575 Disp1.4
  Bottom Layer, Bottom w0.5: U1.20 70.85,26.613 70.84,26.603 70.84,25.41 71.1,25.15 v2(71.1,23.8)
NetDisp1_5: Disp1.5 U1.17 | length 6.1
  Top Layer, Top w0.5: Disp1.5 74.165,23.725 74.44,24 v2(74.7,24)
  Bottom Layer, Bottom w0.5: U1.17 74.68,28.78 74.68,24.02 v2(74.7,24)
NetDisp1_7: Disp1.7 U1.16 | length 7.1
  Bottom Layer, Bottom w0.5: U1.16 75.93,26.57 v2(79.4,23.1)
NetDisp1_8: Disp1.8 U1.3 | length 15.1
  Top Layer, Top w0.5: Disp1.8 v2(79.245,33.155)
  Bottom Layer, Bottom w0.5: U1.3 68.31,34.39 69.1,33.6 78.611,33.6 79.056,33.155 v2(79.245,33.155)
NetDisp1_9: Disp1.9 U1.7 | length 7
  Top Layer, Top w0.5: v2(76.6,34.9) 76.6,33.155 Disp1.9
  Bottom Layer, Bottom w0.5: U1.7 73.41,37.936 73.41,36.79 75.25,34.95 76.55,34.95 v2(76.6,34.9)
NetDisp1_10: Disp1.10 U1.15 | length 6.1
  Top Layer, Top w0.5: Disp1.10 74.2,33.015 v2(74.2,32.2)
  Bottom Layer, Bottom w0.5: v2(74.2,32.2) 74.334,32.066 75.334,32.066 77.18,30.22 77.18,28.82 U1.15
NetDisp1_11: Disp1.11 U1.14 | length 10.2
  Top Layer, Top w0.5: Disp1.11 72.268,32.407 72.268,31.132 73.3,30.1 v2(78.5,30.1)
  Bottom Layer, Bottom w0.5: U1.14 78.47,30.07 v2(78.5,30.1)
NetDisp1_12: Disp1.12 U1.6 | length 4.4
  Bottom Layer, Bottom w0.5: v2(69.7,35) 69.834,35.134 70.534,35.134 72.1,36.7 72.1,37.936 U1.6
NetDisp1_13: Disp1.13 U1.11 | length 17.6
  Top Layer, Top w0.5: Disp1.13 66.545,35.345 67.5,36.3 77.8,36.3 v2(78.6,35.5)
  Bottom Layer, Bottom w0.5: U1.11 78.466,37.952 78.466,35.634 v2(78.6,35.5)
NetDisp1_14: Disp1.14 U1.2 | length 6.5
  Top Layer, Top w0.5: v2(63.9,33.2) Disp1.14@64.2,33.5
  Bottom Layer, Bottom w0.5: v2(63.9,33.2) 63.9,33.389 64.25,33.739 64.25,33.75 67.02,36.52 67.02,37.936 U1.2
NetP1_2: P1.2 R2.1 | length 5.8
  Top Layer, Top w0.5: P1.2 53.7,37.332 57.118,40.75 57.283,40.75 57.668,41.135 R2.1
NetP1_3: P1.3 R1.1 | length 5.8
  Top Layer, Top w0.5: P1.3 53.809,39.76 57.684,43.635 R1.1
NetP2_2: P2.2 R5.1 | length 13.7
  Top Layer, Top w0.5: P2.2 57.684,28.504 R5.1
NetP2_3: P2.3 R4.1 | length 13.7
  Top Layer, Top w0.5: P2.3 55.8,29.16 55.8,37.2 56.95,38.35 57.299,38.35 57.684,38.735 R4.1
NetPA3_1: PA3.1 U2.13 | length 2.8
  Top Layer, Top w0.25: PA3.1 86.839,36.639 87.264,36.639 88.45,37.825 U2.13
NetPA8_1: PA8.1 U2.29 | length 4.7
  Top Layer, Top w0.25: U2.29 96.959,40.95 97.609,41.6 PA8.1
NetPA9_1: PA9.1 U2.30 | length 7.1
  Top Layer, Top w0.25: U2.30 96.159,41.45 97.509,42.8 99.631,42.8 99.892,43.061 100.761,43.061 PA9.1
NetPA10_1: PA10.1 U2.31 | length 4.8
  Top Layer, Top w0.25: U2.31 95.95,41.95 97.761,43.761 98.461,43.761 PA10.1@98.7,44
NetPA11_1: PA11.1 U2.32 | length 7.8
  Top Layer, Top w0.25: U2.32 95.696,42.45 98.371,45.125 100.025,45.125 PA11.1
NetPA12_1: PA12.1 U2.33 | length 6.1
  Top Layer, Top w0.25: U2.33 95.489,42.95 99.1,46.561 PA12.1
NetPA15_1: PA15.1 U2.38 | length 4.8
  Top Layer, Top w0.25: U2.38 93.45,46.05 95.1,47.7 PA15.1
NetPB5_1: PB5.1 U2.41 | length 8.8
  Top Layer, Top w0.25: U2.41 91.95,49.05 93.5,50.6 94.8,50.6 95.6,51.4 PB5.1
NetPB7_1: PB7.1 U2.43 | length 7.9
  Top Layer, Top w0.25: U2.43 90.95,49.25 PB7.1
NetPB10_1: PB10.1 U2.21 | length 5
  Top Layer, Top w0.25: U2.21 92.45,36.371 93.316,35.505 93.695,35.505 PB10.1
NetPB12_1: PB12.1 U2.25 | length 4.9
  Top Layer, Top w0.25: U2.25 95.25,38.95 97.5,36.7 PB12.1@98.7,36.7
NetPB13_1: PB13.1 U2.26 | length 6.4
  Top Layer, Top w0.25: U2.26 95.55,39.45 97.1,37.9 PB13.1@100.5,37.9
NetPB14_1: PB14.1 U2.27 | length 4.7
  Top Layer, Top w0.25: U2.27 96.05,39.95 96.574,39.426 98.974,39.426 PB14.1
NetPB15_1: PB15.1 U2.28 | length 5.9
  Top Layer, Top w0.25: U2.28 99.812,40.45 100.162,40.8 PB15.1@100.5,40.8
NetR3_2: R3.2 U1.18 | length 7.7
  Bottom Layer, Bottom w0.4: U1.18 73.39,23.21 73.966,22.634 73.966,21.85 R3.2
NetR8_1: R8.1 SW1.3 SW1.4 | length 11.7
  Top Layer, Top w0.5: R8.1 96.85,29.8 SW1.3
  Bottom Layer, Bottom w0.5: SW1.4 SW1.3
NetR13_2: R13.2 R14.1 U4.3 | length 6.2
  Top Layer, Top w0.5: R13.2 109.935,33.584 111.501,35.15 U4.3
NRST: C9.2 R10.1 U2.7 | length 13.9
  Top Layer, Top w0.25: v2(83,38.8) 83.07,38.8 84.375,40.105 84.375,40.654 85.173,41.452 85.813,41.452 85.814,41.45 86.004,41.45 U2.7
  Bottom Layer, Bottom w0.5: C9.2 79.208,43.276 81.592,43.276 R10.1 81.765,43.284 83.2,41.849 83.2,39.443 83.134,39.377 83.134,38.934 v2(83,38.8)
PB2: R12.2 U2.20 | length 6.6
  Top Layer, Top w0.25: R12.2 91.784,32.365 92.294,32.875 92.354,32.875 92.5,33.022 92.5,35.3 91.95,35.85 U2.20
R_Rell_DIR: R1.2 U2.39 | length 38.1
  Top Layer, Top w0.25: U2.39 92.95,46.693 93.5,47.243 v2(93.5,47.5)
  Top Layer, Top w0.5: R1.2 59.916,44 v2(69.7,44)
  Bottom Layer, Bottom w0.5: v2(69.7,44) 73.5,47.8 93.011,47.8 93.311,47.5 v2(93.5,47.5)
R_Rell_INT: R2.2 U2.11 | length 30.9
  Top Layer, Top w0.25: 82.7,36.9 84.397,36.9 86.947,39.45 U2.11
  Top Layer, Top w0.4: R2.2 61.9,41.3 63.8,39.4 80.2,39.4 82.7,36.9
SWCLK: P3.3 U2.37 | length 13.7
  Top Layer, Top w0.25: U2.37 93.95,45.575 93.975,45.575 96.048,47.648
  Top Layer, Top w0.35: 96.048,47.648 98.12,49.72 P3.3
SWDIO: P3.2 U2.34 | length 16.6
  Top Layer, Top w0.25: U2.34 95.282,43.45 96.8,44.968 96.8,46.8
  Top Layer, Top w0.35: 96.8,46.8 99.5,49.5 99.5,56.04 P3.2
USR_BTN: R8.2 U2.10 | length 16.8
  Top Layer, Top w0.25: v2(84.471,38.353) 84.728,38.353 84.953,38.578 85.078,38.578 86.45,39.95 U2.10
  Top Layer, Top w0.4: v2(90.3,29.9) 91.684,29.9 R8.2
  Bottom Layer, Bottom w0.5: v2(84.471,38.353) 84.564,38.26 84.564,37.536 86.5,35.6 87.4,35.6 90.3,32.7 v2(90.3,29.9)
Vin: Dsh1.A P4.2 | length 2.5
  Top Layer, Top w0.8: Dsh1.A 111.62,26.145 111.62,25.08 111.63,25.07 111.63,24.03 P4.2
pads on no net: Disp1.6 U1.5 U1.8 U1.10 U1.24 U2.18 U2.42 U2.45 U2.46 U3.2 U3.3 U3.7@110.2,51.05 U3.7@110.2,51.95

## Polygon pours and split planes (outlines as drawn)
GND on Top Layer, Top "NONET_L01_P-001" (solid, remove dead copper, pour order 4): 50,60.1 50,20 119.9,20 120,20.1 120,60.1
5V on Top Layer, Top "NONET_L01_P-001" (solid, remove dead copper, pour order 0): 116.94,41.773 116.913,41.8 108.8,41.8 108.3,41.3 108.3,39.8 107.3,38.8 107.3,35.1 107.2,35 102.9,35 102.6,35.3 102.6,39.3 102.7,39.4 105.2,39.4 106.2,40.4 106.2,43.2 106.8,43.8 111.6,43.8 112.1,44.3 112.1,46.6 112.2,46.7 113.6,46.7 114.3,46 114.3,44.7 115.2,43.8 116.9,43.8 116.9,43.566 116.94,43.526
3V3 on Vcc "NONET_L01_P-001" (solid, remove dead copper, pour order 2): 106.8,53.8 103.2,53.8 102,55 97.3,55 96.9,55.4 96.9,57.8 96.3,58.4 95,58.4 85.5,48.9 57.9,48.9 52,43 52,41.7 52.8,40.9 55,40.9 55,33.8 52.5,31.3 52.5,28.6 52.7,28.4 55,28.4 58.8,32.2 58.8,42.2 61.6,45 93.5,45 94.5,44 94.5,36.3 95.3,35.5 96.3,35.5 98,37.2 98,42.4 107.4,51.8 107.4,53.2
GND on GND "NONET_L01_P-001" (solid, pour order 1): 50,60.1 49.9,60 49.9,19.9 120.1,19.9 120,20 120,60.2
GND on Bottom Layer, Bottom "NONET_L01_P-001" (solid, remove dead copper, pour order 3): 50,60 50.1,59.9 50.1,20 120.1,20 119.9,20.2 119.9,59.9 50.4,59.9

## Keep-outs
Keep-Out Layer, Board:
  pour cut-out: 59.4,53.75 cw(c59.4,55.8) 59.4,57.85 63.8,57.85 cw(c63.8,55.8) 63.8,53.75
  lines w0.25: 50,20 50,60 120,60 120,20 50,20
  lines w0.254: 59.4,53.75 cw(c59.4,55.8) 59.4,57.85 63.8,57.85 cw(c63.8,55.8) 63.8,53.75 59.4,53.75 ; 79.5,53.75 cw(c79.5,55.8) 79.5,57.85 83.9,57.85 cw(c83.9,55.8) 83.9,53.75 79.5,53.75

## Other copper
Top Layer, Top:
  pour cut-out: 112.3,43.272 112.3,38.794 112.206,38.7 117.3,38.7 117.3,43.272
  text "1" at 51.12,58.22 h0.9
Vcc:
  text "2" at 51.92,58.22 h0.9
GND:
  text "3" at 53.58,58.22 h0.9
Bottom Layer, Bottom:
  text "4" at 54.48,58.22 h0.9

## Silkscreen, mask and mechanical layers (free items; w line width, h text height)
Top Overlay, Top Silk:
  text "TOP" at 116.491,58.297 h0.9
  text "Prog." at 105,57 h1.2
  text "G" at 103.68,54.82 h0.9 r90
  text "DIO" at 100.48,53.42 h0.9 r90
  text "CLK" at 98.68,53.22 h0.9 r90
  text "3.3V" at 95.88,52.52 h0.9 r90
  text "Revox Counter v2" at 58.2,50.6 h1.2
  text "08.10.2024" at 61.4,48.4 h1.2
  text "-" at 116.1,23 h1.2
  text "+" at 109.3,22.9 h1.2
  text "DB5AT" at 89.2,22.5 h1.2
Bottom Overlay, Bot Silk:
  text "BOT" at 118.88,58.32 h0.9